# Altium PCB remote.PcbDoc (part 2 of 2)
Units mil, origin at the board's own origin, x right, y up, seen from the top; angles counter-clockwise.
Board outline 4260 x 2525 mil, 2 copper layers (Top Layer, Bottom Layer); 74 components, 68 nets, 281 pads, 69 vias.
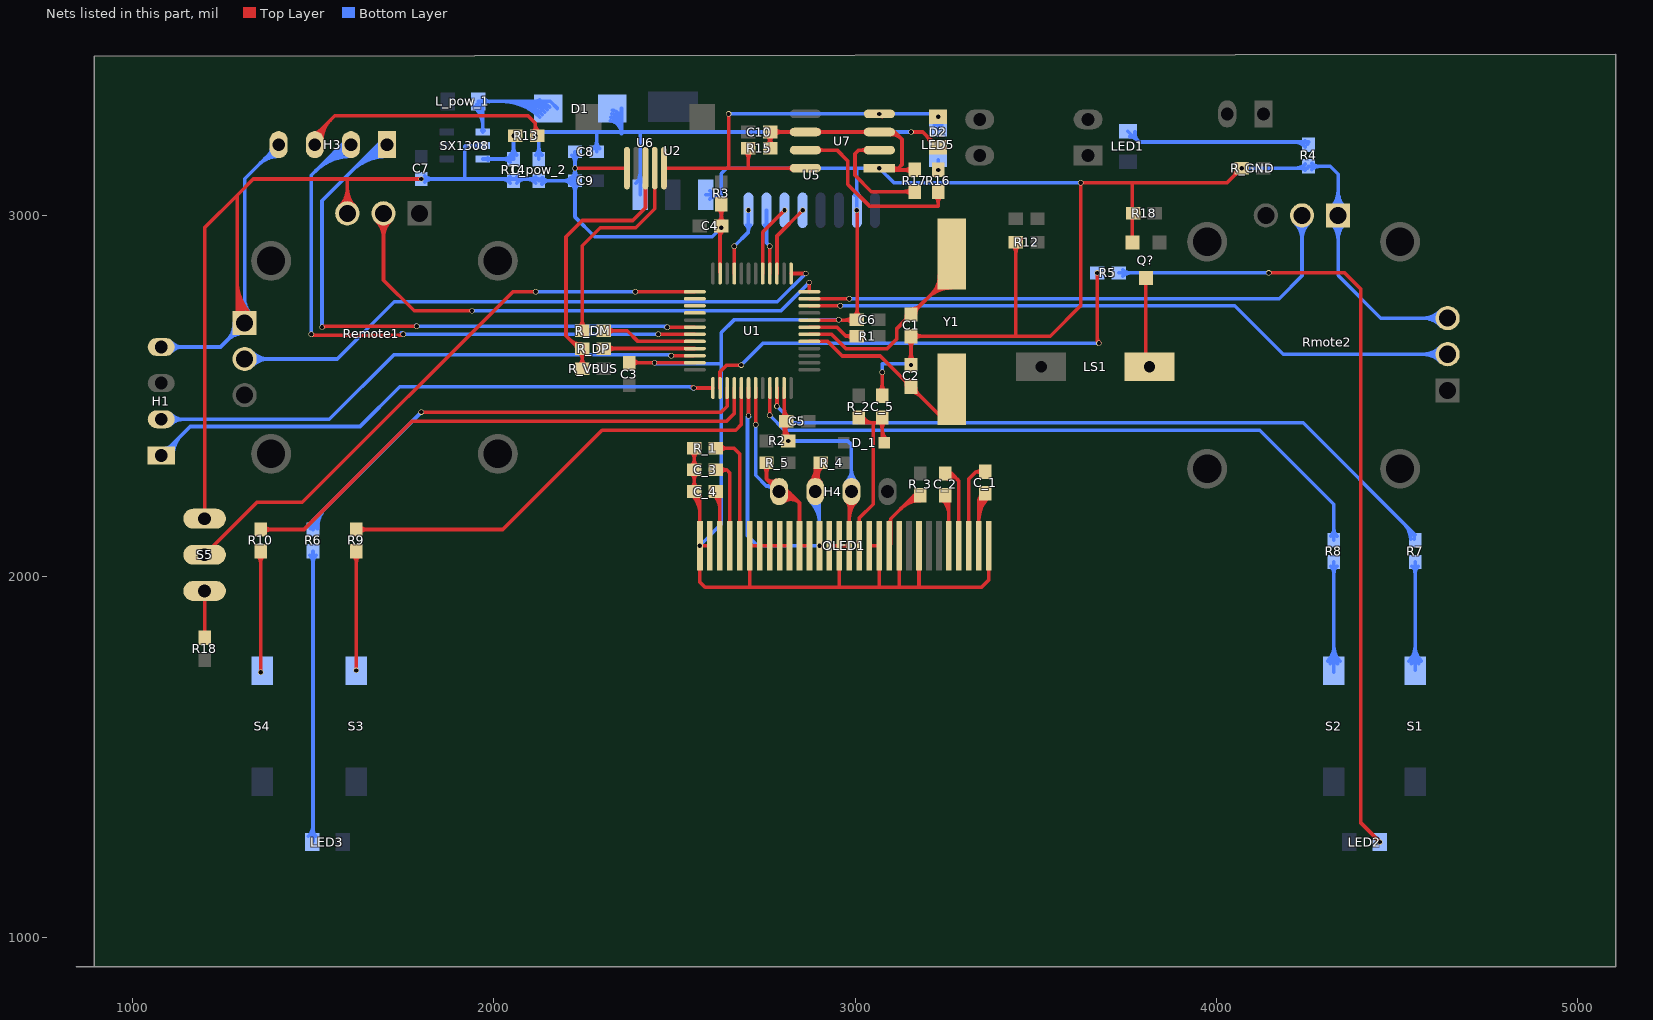
[diagram p2: the nets of this part, all layers, seen from the top]

## Via types
v1: diameter 15, hole 12, Top Layer to Bottom Layer, 69 vias

## Nets (pads, with @x,y where several pads share a name; then routed paths per layer and width w, separated by ;. In a path a pad name is that pad's centre, name@x,y a point inside that pad or via, vN(x,y) a via of type N, cw(c..) or ccw(c..) an arc to the next point about the centre after c; other vN are vias at no path point) (continued)
GND: C1.1 C2.1 C3.1 C4.1 C5.1 C6.1 C7.1 C8.1 C9.1 C10.1 C_3.1 C_4.1 C_5.1 C_pow_2.1 H1.4 H3.4 H4.2 OLED1.1 OLED1.8 OLED1.10 OLED1.12 OLED1.13 OLED1.15 OLED1.16 OLED1.17 OLED1.21 OLED1.22 OLED1.23 OLED1.24 OLED1.25 OLED1.29 OLED1.30 Q?.2 R2.1 R3.2 R4.2 R12.2 R14.2 R15.1 R17.1 R18.1@3770,3005 R_1.1 R_GND.1 Remote1.3 Remote1.4 Rmote2.3 Rmote2.4 S5.1 SX1308.2 U1.8 U1.23 U1.35 U1.47 U2.1 U5.2 U6.5 U7.1 U7.3 U7.6 | length 17459.2
  Top Layer w10: S5.1@1200,2160.01 1200,2965 1290,3055 ; Remote1.4@1290,2710 1290,3055 ; 1290,2748.23 ccw(c1357.13,2748.23) Remote1.4@1309.66,2700.76 ; 1290,2772.37 ccw(c1381.27,2772.37) Remote1.4@1316.73,2707.84 ; 1290,2796.52 ccw(c1405.41,2796.52) Remote1.4@1323.8,2714.91 ; 1290,2820.66 ccw(c1429.56,2820.66) Remote1.4@1330.88,2721.98 ; Remote1.3@1574.87,3025.13 ccw(c1526.28,3073.72) 1595,3073.72 ccw(c1663.72,3073.72) Remote1.3@1615.13,3025.13 ; Remote1.3@1581.94,3018.06 ccw(c1550.42,3049.58) 1595,3049.58 ccw(c1639.58,3049.58) Remote1.3@1608.06,3018.06 ; Remote1.3@1595,3005 1595,3100 ; v1(1800,3100) 1595,3100 ; v1@2225.12,3130.12 U6.5@2368.82,3130.12 ; C3.1@2376.42,2591.42 v1(2445,2591.42) U1.35@2556.54,2591.42 ; C3.1@2383.84,2583.66 cw(c2402.56,2564.94) 2402.56,2591.42 ; C3.1@2383.84,2601.34 ccw(c2407.79,2625.29) 2407.79,2591.42 ; C_4.1@2546.16,2243.84 ccw(c2524.82,2265.18) 2555,2265.18 ccw(c2585.18,2265.18) C_4.1@2563.84,2243.84 ; C_3.1@2546.16,2286.16 cw(c2524.82,2264.82) 2555,2264.82 cw(c2585.18,2264.82) C_3.1@2563.84,2286.16 ; C_3.1@2546.16,2303.84 ccw(c2524.82,2325.18) 2555,2325.18 ccw(c2585.18,2325.18) C_3.1@2563.84,2303.84 ; R_1.1@2546.16,2346.16 cw(c2524.82,2324.82) 2555,2324.82 cw(c2585.18,2324.82) R_1.1@2563.84,2346.16 ; C_4.1@2548.66,2226.16 cw(c2495.24,2172.74) 2570.79,2172.74 ; R_1.1@2555,2355 C_3.1@2555,2295 C_4.1@2555,2235 2570.79,2219.21 OLED1.30@2570.79,2085 ; C_4.1@2555.73,2233.23 cw(c2519.39,2196.89) 2570.79,2196.89 ; C_4.1@2562.8,2240.3 cw(c2543.53,2221.03) C_4.1@2570.79,2221.03 ; OLED1.30@2568.23,2083.23 cw(c2562.06,2077.06) OLED1.30@2570.79,2077.06 ; OLED1.30@2568.23,2086.77 ccw(c2562.06,2092.94) OLED1.30@2570.79,2092.94 ; OLED1.29@2598.35,2085 OLED1.30@2570.79,2085 ; C4.1@2618.66,2961.16 cw(c2599.94,2942.44) 2626.42,2942.44 ; C4.1@2621.16,2978.84 ccw(c2599.82,3000.18) 2630,3000.18 ccw(c2660.18,3000.18) C4.1@2638.84,2978.84 ; R3.2@2621.16,3018.66 cw(c2599.82,2997.32) 2630,2997.32 cw(c2660.18,2997.32) R3.2@2638.84,3018.66 ; U1.23@2626.42,2841.42 2626.42,2966.42 v1(2630,2965) R3.2@2630,3030 ; 2626.42,2937.21 cw(c2660.29,2937.21) C4.1@2636.34,2961.16 ; 2626.42,2950.32 cw(c2644.68,2950.32) C4.1@2631.77,2963.23 ; C4.1@2628.17,2963.3 cw(c2619.72,2955.45) 2629.71,2949.68 ; 2708.58,1971.42 OLED1.25@2708.58,2085 OLED1.24@2736.14,2085 OLED1.23@2763.7,2085 OLED1.22@2791.26,2085 OLED1.21@2818.82,2085 ; R15.1@2756.16,3193.84 ccw(c2734.82,3215.18) 2765,3215.18 ccw(c2795.18,3215.18) R15.1@2773.84,3193.84 ; C10.1@2756.16,3221.16 cw(c2734.82,3199.82) 2765,3199.82 cw(c2795.18,3199.82) C10.1@2773.84,3221.16 ; R15.1@2765,3185 C10.1@2765,3230 U7.6@2862.64,3230 U7.3@3067.36,3230 3110,3230 3130,3210 3130,3140 3120,3130 3085,3130 3090,3125 R17.1@3165,3125 ; C10.1@2776.34,3221.16 cw(c2797.68,3199.82) 2797.68,3230 cw(c2797.68,3260.18) C10.1@2776.34,3238.84 ; C5.1@2798.66,2421.16 cw(c2786.78,2409.28) 2803.58,2409.28 ; C5.1@2798.66,2438.84 ccw(c2786.78,2450.72) 2803.58,2450.72 ; R2.1@2803.58,2378.58 U1.47@2803.58,2521.54 ; R2.1@2803.58,2384.46 ccw(c2824.46,2384.46) R2.1@2809.7,2369.7 ; R2.1@2803.58,2390.36 cw(c2847.14,2390.36) C5.1@2816.34,2421.16 ; 2803.58,2402.56 ccw(c2840.06,2402.56) R2.1@2814.27,2376.77 ; 2803.58,2408.6 ccw(c2848.6,2408.6) R2.1@2816.77,2376.77 ; C5.1@2803.58,2426.71 ccw(c2864.21,2426.71) R2.1@2821.34,2383.84 ; 2803.58,2469.64 ccw(c2847.14,2469.64) C5.1@2816.34,2438.84 ; U7.6@2826.33,3225.18 ccw(c2814.7,3213.56) 2814.7,3230 ccw(c2814.7,3246.44) U7.6@2826.33,3234.82 ; U1.8@2873.46,2709.53 C6.1@3004.53,2709.53 ; U7.6@2898.95,3225.18 cw(c2910.58,3213.56) 2910.58,3230 cw(c2910.58,3246.44) U7.6@2898.95,3234.82 ; OLED1.17@2929.06,2085 OLED1.16@2956.61,2085 ; 2956.61,1973.39 OLED1.16@2956.61,2085 ; 2971.18,2709.53 ccw(c2971.18,2741.32) C6.1@2993.66,2718.84 ; 2973.46,2709.53 cw(c2973.46,2680.96) C6.1@2993.66,2701.16 ; H4.2@2975.86,2208.36 cw(c2955.78,2188.28) 2984.17,2188.28 ; 2984.17,2160.15 cw(c3052.35,2160.15) H4.2@3004.14,2208.36 ; 2984.17,2184.29 cw(c3028.21,2184.29) H4.2@2997.07,2215.43 ; C6.1@2996.16,2718.84 ccw(c2972.21,2742.79) 3006.08,2742.79 ; H4.2@3000,2250 2984.17,2234.17 OLED1.15@2984.17,2085 OLED1.16@2956.61,2085 ; v1@3003.23,3011.78 cw(c2996.35,3004.89) 3006.08,3004.89 ; C6.1@3005,2710 3006.08,2711.08 v1@3006.08,3008.92 ; 3006.08,2737.56 ccw(c3032.56,2737.56) C6.1@3013.84,2718.84 ; U7.3@3031.05,3225.18 ccw(c3019.42,3213.56) 3019.42,3230 ccw(c3019.42,3246.44) U7.3@3031.05,3234.82 ; OLED1.13@3039.29,2085 OLED1.12@3066.85,2085 3066.85,1971.85 ; C_5.1@3066.16,2511.34 ccw(c3044.82,2532.68) 3075,2532.68 ccw(c3105.18,2532.68) C_5.1@3083.84,2511.34 ; C_5.1@3075,2500 v1(3075,2565) ; U7.3@3098.86,3223.19 cw(c3098.86,3179.85) 3129.51,3210.49 ; U7.3@3098.86,3233.19 cw(c3098.86,3213.99) 3112.43,3227.57 ; U7.1@3103.67,3125.18 cw(c3115.3,3113.56) 3115.3,3130 cw(c3115.3,3146.44) 3103.67,3134.82 ccw(c3127.37,3158.51) 3127.37,3125 ; 3121.97,1971.97 OLED1.10@3121.97,2085 ; C2.1@3146.16,2596.34 ccw(c3124.82,2617.68) 3155,2617.68 ccw(c3185.18,2617.68) C2.1@3163.84,2596.34 ; C1.1@3146.16,2653.66 cw(c3124.82,2632.32) 3155,2632.32 cw(c3185.18,2632.32) C1.1@3163.84,2653.66 ; v1(3155,2585) C1.1@3155,2665 3540,2665 3625,2750 v1(3625,3090) 4030,3090 v1(4070,3130) ; R17.1@3156.16,3116.16 ccw(c3134.82,3094.82) 3134.82,3125 ccw(c3134.82,3155.18) R17.1@3156.16,3133.84 ; C1.1@3163.84,2656.16 cw(c3185.18,2634.82) 3185.18,2665 cw(c3185.18,2695.18) C1.1@3163.84,2673.84 ; 3177.09,1972.09 OLED1.8@3177.09,2085 ; OLED1.1@3370,2085 3370,1990 3350,1970 2585,1970 2570.79,1984.21 OLED1.30@2570.79,2085 ; R12.2@3436.16,2916.16 cw(c3414.82,2894.82) 3445,2894.82 cw(c3475.18,2894.82) R12.2@3453.84,2916.16 ; 3445,2665 R12.2@3445,2925 ; Q?.2@3767.6,2924.21 3767.6,3087.4 ; 4044.39,3104.39 ccw(c4018.79,3130) R_GND.1@4055,3130 ; 4050.43,3110.43 cw(c4067.5,3093.36) R_GND.1@4067.5,3117.5 ; 1290,3055 1335,3100 1595,3100
  Bottom Layer w10: H1.4@1080,2635 1243.9,2635 Remote1.4@1310.75,2701.85 1310.75,3100.75 H3.4@1405,3195 ; H1.4@1106.64,2620.86 cw(c1140.78,2586.72) 1140.78,2635 cw(c1140.78,2683.28) H1.4@1106.64,2649.14 ; Remote1.4@1282.28,2701.85 cw(c1213.56,2701.85) 1262.16,2653.26 cw(c1310.75,2604.67) Remote1.4@1310.75,2673.39 ; Remote1.4@1290.62,2721.98 ccw(c1242.03,2770.57) 1310.75,2770.57 ccw(c1379.47,2770.57) Remote1.4@1330.88,2721.98 ; Remote1.4@1292.28,2701.85 cw(c1247.71,2701.85) 1279.23,2670.33 cw(c1310.75,2638.81) Remote1.4@1310.75,2683.39 ; Remote1.4@1297.69,2714.91 ccw(c1266.17,2746.43) 1310.75,2746.43 ccw(c1355.32,2746.43) Remote1.4@1323.8,2714.91 ; 1349.52,3139.52 cw(c1405,3084.04) H3.4@1405,3162.5 ; 1366.59,3156.59 cw(c1405,3118.18) H3.4@1405,3172.5 ; 1379.7,3169.7 ccw(c1366.89,3182.5) H3.4@1385,3182.5 ; v1(1800,3100) 1920,3100 ; C7.1@1808.84,3091.16 cw(c1830.18,3069.82) 1830.18,3100 cw(c1830.18,3130.18) C7.1@1808.84,3108.84 ; SX1308.2@1956.78,3188.96 ccw(c1948.24,3180.43) 1948.24,3192.5 ccw(c1948.24,3204.57) SX1308.2@1956.78,3196.04 ; SX1308.2@1970,3192.5 1922.5,3192.5 1920,3190 1920,3100 ; 2018.79,3100 cw(c2018.79,3061.29) R14.2@2046.16,3088.66 ; 2030.86,3100 ccw(c2030.86,3121.64) R14.2@2046.16,3106.34 ; R14.2@2063.84,3088.66 cw(c2091.21,3061.29) 2091.21,3100 ; R14.2@2063.84,3106.34 ccw(c2079.14,3121.64) 2079.14,3100 ; 2088.79,3100 cw(c2088.79,3061.29) C_pow_2.1@2116.16,3088.66 ; 2100.86,3100 ccw(c2100.86,3121.64) C_pow_2.1@2116.16,3106.34 ; C_pow_2.1@2125,3095 C9.1@2225,3095 ; C_pow_2.1@2125,3100 1920,3100 ; C_pow_2.1@2133.84,3086.16 cw(c2155.18,3064.82) 2155.18,3095 cw(c2155.18,3125.18) C_pow_2.1@2133.84,3103.84 ; C9.1@2213.66,3086.16 ccw(c2192.32,3064.82) 2192.32,3095 ccw(c2192.32,3125.18) C9.1@2213.66,3103.84 ; C9.1@2216.16,3086.16 cw(c2194.82,3064.82) 2225,3064.82 cw(c2255.18,3064.82) C9.1@2233.84,3086.16 ; C9.1@2216.16,3103.84 ccw(c2194.82,3125.18) 2225,3125.18 ccw(c2255.18,3125.18) C9.1@2233.84,3103.84 ; C8.1@2216.16,3166.16 cw(c2194.82,3144.82) 2225,3144.82 cw(c2255.18,3144.82) C8.1@2233.84,3166.16 ; v1@2222.83,3128.75 cw(c2213.92,3123.6) 2223.86,3120.94 ; C8.1@2225,3175 C9.1@2225,3095 ; 2226.14,3120.94 cw(c2236.08,3123.6) v1@2227.17,3128.75 ; v1(2445,2591.42) 2447.81,2588.6 2630,2588.6 ; v1@2446.77,2593.19 ccw(c2457.83,2604.25) 2457.83,2588.6 ; v1(2570,2085) 2630,2145 2630,2588.6 ; U2.1@2586.55,3055.95 2629.05,3055.95 ; U2.1@2598.33,3044.18 cw(c2626.76,3015.75) 2626.76,3055.95 cw(c2626.76,3096.16) U2.1@2598.33,3067.73 ; v1(2815,2375) 2980,2375 2990,2365 H4.2@2990,2235 ; v1(2955,2710) 2665,2710 2630,2675 2630,2588.6 ; H4.2@2975.86,2261.64 ccw(c2941.72,2295.78) 2990,2295.78 ccw(c3038.28,2295.78) H4.2@3004.14,2261.64 ; U5.2@2998.79,3055.18 ccw(c2983.8,3070.17) 3005,3070.17 ccw(c3026.2,3070.17) U5.2@3011.21,3055.18 ; v1(3005,3013.54) 3005,3130 ; v1(3075,2565) 3075,2588.6 v1@3151.4,2588.6 ; 3140.27,2588.6 cw(c3140.27,2570.27) v1@3153.23,2583.23 ; v1(3625,3090) 3107.36,3090 v1(3067.36,3130) 3005,3130 ; v1(4070,3130) R4.2@4252.6,3130 ; 4218.79,3130 ccw(c4218.79,3168.71) R4.2@4246.16,3141.34 ; 4230.86,3130 cw(c4230.86,3108.36) R4.2@4246.16,3123.66 ; R4.2@4255,3135 4315,3135 4336.85,3113.15 Rmote2.4@4336.85,2999.25 4336.85,2833.15 4455,2715 Rmote2.3@4640,2715 ; R4.2@4263.84,3126.16 cw(c4285.18,3104.82) 4285.18,3135 cw(c4285.18,3165.18) R4.2@4263.84,3143.84 ; Rmote2.4@4316.72,2979.12 cw(c4268.13,2930.53) 4336.85,2930.53 cw(c4405.57,2930.53) Rmote2.4@4356.98,2979.12 ; Rmote2.4@4316.72,3019.38 ccw(c4268.13,3067.97) 4336.85,3067.97 ccw(c4405.57,3067.97) Rmote2.4@4356.98,3019.38 ; Rmote2.4@4323.79,2986.2 cw(c4292.27,2954.68) 4336.85,2954.68 cw(c4381.43,2954.68) Rmote2.4@4349.91,2986.2 ; Rmote2.4@4323.79,3012.31 ccw(c4292.27,3043.83) 4336.85,3043.83 ccw(c4381.43,3043.83) Rmote2.4@4349.91,3012.31 ; Rmote2.3@4619.87,2694.87 ccw(c4571.28,2646.28) 4571.28,2715 ccw(c4571.28,2783.72) Rmote2.3@4619.87,2735.13 ; Rmote2.3@4626.94,2701.94 ccw(c4595.42,2670.42) 4595.42,2715 ccw(c4595.42,2759.58) Rmote2.3@4626.94,2728.06 ; C9.1@2225,3095 2225,2995 2280,2940 2605,2940 v1(2630,2965) 2630,3115 2645,3130 3005,3130
  other v1: 2225,3130
IRQ: U1.21 U5.8 | length 224.6
  Top Layer w10: U1.21@2665.79,2838.46 v1(2665.79,2914.21)
  Bottom Layer w10: v1(2665.79,2914.21) 2705,2953.43 v1(2705,3013.54) ; U5.8@2698.79,2971.9 cw(c2683.8,2956.91) 2705,2956.91 cw(c2726.2,2956.91) U5.8@2711.21,2971.9
KEY1: R7.2 U1.46 | length 2039.9
  Top Layer w10: v1(2783.9,2471.1) U1.46@2783.9,2521.54
  Bottom Layer w10: v1(2783.9,2471.1) 2830,2425 4240,2425 R7.2@4550,2115 ; 4519.82,2145.18 cw(c4477.14,2102.5) R7.2@4537.5,2102.5 ; 4536.89,2128.11 cw(c4511.29,2102.5) R7.2@4547.5,2102.5
KEY2: R8.2 U1.45 | length 1885.7
  Top Layer w10: v1(2764.21,2445.79) U1.45@2764.21,2521.54
  Bottom Layer w10: v1(2764.21,2445.79) 2805,2405 4120,2405 4325,2200 R8.2@4325,2100 ; R8.2@4316.16,2111.34 ccw(c4294.82,2132.68) 4325,2132.68 ccw(c4355.18,2132.68) R8.2@4333.84,2111.34
KEY3: R9.2 U1.41 | length 1334.3
  Top Layer w10: R9.2@1620,2130 2025,2130 2300,2405 2670,2405 2685.47,2420.47 U1.41@2685.47,2521.54 ; R9.2@1628.84,2121.16 cw(c1650.18,2099.82) 1650.18,2130 cw(c1650.18,2160.18) R9.2@1628.84,2138.84
KEY4: R10.2 U1.40 | length 1561.8
  Top Layer w10: R10.2@1355,2130 1475,2130 1775,2430 2645,2430 2665.79,2450.79 U1.40@2665.79,2521.54 ; R10.2@1363.84,2121.16 cw(c1385.18,2099.82) 1385.18,2130 cw(c1385.18,2160.18) R10.2@1363.84,2138.84
LED1: R5.2 U1.38 | length 1341.2
  Top Layer w10: U1.38@2626.42,2521.54 2626.42,2566.42 2645,2585 v1(2685,2585) ; 3670,2663.11 ccw(c3693.11,2663.11) v1@3676.77,2646.77 ; v1(3670,2840) 3670,2650 v1(3675,2645)
  Bottom Layer w10: v1(2685,2585) 2745,2645 v1(3675,2645)
LED2: R6.2 U1.39 | length 1523.1
  Top Layer w10: v1(1800,2455) 2630,2455 2646.1,2471.1 U1.39@2646.1,2521.54
  Bottom Layer w10: R6.2@1492.5,2132.5 cw(c1528.71,2132.5) 1503.11,2158.11 ; R6.2@1493.4,2143.11 ccw(c1486,2155) 1500,2155 ; R6.2@1500,2130 1500,2155 ; R6.2@1502.5,2132.5 cw(c1562.86,2132.5) 1520.18,2175.18 ; R6.2@1506.6,2143.11 cw(c1514,2155) 1500,2155 ; R6.2@1512.5,2132.5 cw(c1597,2132.5) 1537.25,2192.25 ; v1(1800,2455) 1500,2155
MISO: U1.16 U5.7 | length 213.3
  Top Layer w10: U1.16@2764.21,2838.46 v1(2764.21,2914.21) v1@2765,2915
  Bottom Layer w10: U5.7@2748.79,2971.9 cw(c2733.8,2956.91) 2755,2956.91 cw(c2776.2,2956.91) U5.7@2761.21,2971.9 ; U5.7@2755,3013.54 2755,2923.43 v1(2764.21,2914.21)
MOSI: U1.17 U5.6 | length 200.1
  Top Layer w10: U1.17@2744.53,2838.46 2744.53,2953.07 v1(2805,3013.54)
NetC_1_1: C_1.1 OLED1.3 | length 273.1
  Top Layer w10: OLED1.3@3314.88,2085 3314.88,2269.88 3335,2290 ; C_1.1@3350,2282.5 ccw(c3335,2271.25) 3335,2290 ; C_1.1@3350,2297.5 cw(c3335,2308.75) 3335,2290 ; C_1.1@3360,2290 3335,2290
NetC_1_2: C_1.2 OLED1.2 | length 337.8
  Top Layer w10: OLED1.2@3342.44,2085 3342.44,2212.44 ; 3342.44,2154.93 cw(c3432.57,2154.93) C_1.2@3368.84,2218.66 ; 3342.44,2179.07 cw(c3408.43,2179.07) C_1.2@3361.77,2225.73 ; 3342.44,2203.22 cw(c3384.28,2203.22) C_1.2@3354.7,2232.8 ; C_1.2@3347.55,2226.43 cw(c3329.96,2224.92) 3342.44,2212.44 ; C_1.2@3356.04,2215.64 ccw(c3351.83,2203.05) 3342.44,2212.44 ; C_1.2@3360,2230 3342.44,2212.44
NetC_2_1: C_2.1 OLED1.5 | length 224.8
  Top Layer w10: C_2.1@3241.16,2213.66 cw(c3196.25,2168.75) 3259.76,2168.75 ; C_2.1@3248.23,2220.73 cw(c3220.39,2192.89) 3259.76,2192.89 ; C_2.1@3250,2225 3259.76,2215.24 OLED1.5@3259.76,2085
NetC_2_2: C_2.2 OLED1.4 | length 271.3
  Top Layer w10: C_2.2@3251.01,2280.21 cw(c3260.43,2258.79) 3276.98,2275.34 ; C_2.2@3255.03,2271.06 cw(c3266.75,2244.43) 3287.32,2265 ; C_2.2@3267.32,2285 3287.32,2265 ; OLED1.4@3287.32,2085 3287.32,2265
NetC_3_2: C_3.2 OLED1.27 | length 284.5
  Top Layer w10: C_3.2@2615,2295 2645,2295 ; C_3.2@2626.92,2286.78 cw(c2645,2271) 2645,2295 ; C_3.2@2626.92,2303.22 ccw(c2645,2319) 2645,2295 ; OLED1.27@2653.46,2085 2653.46,2286.54 2645,2295
NetC_4_2: C_4.2 OLED1.28 | length 228
  Top Layer w10: C_4.2@2608.66,2226.16 cw(c2567.03,2184.53) 2625.91,2184.53 ; C_4.2@2615,2235 2625.91,2224.09 OLED1.28@2625.91,2085 ; C_4.2@2615.73,2233.23 cw(c2591.17,2208.67) 2625.91,2208.67
NetC_5_2: C_5.2 D_1.1 OLED1.14 R_2.1 | length 649
  Top Layer w10: R_2.1@3010,2425 3050,2425 ; OLED1.14@3011.73,2085 3011.73,2161.73 3050,2200 3050,2425 ; R_2.1@3012.25,2438.6 ccw(c3034,2449.2) 3034,2425 ; R_2.1@3021.24,2442.98 ccw(c3050,2457) 3050,2425 ; C_5.2@3066.16,2428.66 cw(c3044.82,2407.32) 3075,2407.32 cw(c3105.18,2407.32) C_5.2@3083.84,2428.66 ; D_1.1@3075,2361 3075,2425 3050,2425 ; 3075,2386.29 ccw(c3097.29,2386.29) D_1.1@3081.53,2370.53 ; 3075,2410.43 ccw(c3121.43,2410.43) D_1.1@3088.6,2377.6
NetD1_1: D1.1 L_pow_1.1 SX1308.1 | length 929
  Bottom Layer w10: L_pow_1.1@1946.89,3299.39 cw(c1891.11,3243.61) 1970,3243.61 ; L_pow_1.1@1953.96,3306.46 cw(c1915.25,3267.75) 1970,3267.75 ; L_pow_1.1@1957.5,3315 2156.42,3315 D1.1@2176.42,3295 ; L_pow_1.1@1961.04,3313.54 cw(c1939.39,3291.89) L_pow_1.1@1970,3291.89 ; SX1308.1@1966.46,3233.54 ccw(c1957.93,3242.07) 1970,3242.07 ccw(c1982.07,3242.07) SX1308.1@1973.54,3233.54 ; L_pow_1.1@1967.5,3310 1970,3307.5 SX1308.1@1970,3230 ; L_pow_1.1@1968.11,3304.39 cw(c1993.71,3278.79) 1993.71,3315 cw(c1993.71,3351.21) L_pow_1.1@1968.11,3325.61 ; 2020.16,3315 cw(c2020.16,3163.74) D1.1@2127.11,3270.7 ; 2044.3,3315 cw(c2044.3,3187.88) D1.1@2134.19,3277.77 ; 2068.44,3315 cw(c2068.44,3212.02) D1.1@2141.26,3284.84 ; 2092.58,3315 cw(c2092.58,3236.17) D1.1@2148.33,3291.91 ; D1.1@2127.11,3319.3 cw(c2116.72,3329.69) 2116.72,3315 cw(c2116.72,3260.31) D1.1@2155.4,3298.98
NetD2_1: D2.1 LED5.1 R15.2 U6.1 U7.4 U7.8 | length 1372.1
  Top Layer w10: U6.1@2471.3,3130 2650,3130 ; v1(2650,3280) 2650,3130 ; R15.2@2696.16,3176.16 cw(c2674.82,3154.82) 2705,3154.82 cw(c2735.18,3154.82) R15.2@2713.84,3176.16 ; 2705,3135 R15.2@2705,3185 ; U7.8@2826.33,3125.18 ccw(c2814.7,3113.56) 2814.7,3130 ccw(c2814.7,3146.44) U7.8@2826.33,3134.82 ; U7.8@2862.64,3130 2650,3130 ; v1(3067.36,3280) U7.4@3074.86,3272.5
  Bottom Layer w10: v1(2650,3280) v1(3067.36,3280) 3222.5,3280 v1(3230,3272.5) ; 3205.86,3280 cw(c3205.86,3248.36) v1@3228.23,3270.73 ; LED5.1@3219.66,3248.36 ccw(c3196.67,3272.5) v1(3230,3272.5) ; LED5.1@3230,3237.5 v1(3230,3272.5) ; LED5.1@3240.34,3248.36 cw(c3263.33,3272.5) v1(3230,3272.5)
NetLED1_2: LED1.2 R4.1 | length 628.1
  Bottom Layer w10: LED1.2@3755,3232.5 3785.1,3202.4 ; LED1.2@3760,3217.5 cw(c3760,3193.36) 3777.07,3210.43 ; LED1.2@3774.92,3230.98 ccw(c3810.1,3227.4) 3785.1,3202.4 ; 4212.99,3202.4 cw(c4212.99,3155.49) R4.1@4246.16,3188.66 ; 4236.66,3202.4 ccw(c4236.66,3215.84) R4.1@4246.16,3206.34 ; 4237.13,3202.4 cw(c4237.13,3179.63) R4.1@4253.23,3195.73 ; R4.1@4255,3202.4 3785.1,3202.4
NetLED2_2: LED2.2 R5.1 | length 2287.8
  Top Layer w10: v1(4145,2840) 4355,2840 4400,2795 4400,1317.5 v1(4452.5,1265)
  Bottom Layer w10: R5.1@3730,2840 v1(4145,2840) ; R5.1@3741.34,2831.16 cw(c3762.68,2809.82) 3762.68,2840 cw(c3762.68,2870.18) R5.1@3741.34,2848.84
NetLED3_2: LED3.2 R6.1 | length 906.8
  Bottom Layer w10: LED3.2@1486.89,1280.61 ccw(c1455.25,1312.25) 1500,1312.25 ; R6.1@1491.16,2058.66 cw(c1469.82,2037.32) 1500,2037.32 cw(c1530.18,2037.32) R6.1@1508.84,2058.66 ; LED3.2@1500,1267.5 R6.1@1500,2070 ; 1500,1300.18 ccw(c1527.68,1300.18) LED3.2@1508.11,1280.61
NetLED5_2: LED5.2 R16.1 | length 65.4
  Top Layer w10: R16.1@3227.5,3125 v1(3230,3125)
  Bottom Layer w10: LED5.2@3221.88,3139.89 cw(c3212.29,3125) v1(3230,3125) ; LED5.2@3230,3152.5 v1(3230,3125) ; LED5.2@3238.12,3139.89 ccw(c3247.71,3125) v1(3230,3125)
NetLS1_2: LS1.2 Q?.3 | length 235.8
  Top Layer w10: LS1.2@3805,2590 Q?.3@3805,2825.79
NetOLED1_11: OLED1.11 R_3.1 | length 318.2
  Top Layer w10: OLED1.11@3092.82,2148.42 ccw(c3085.06,2160.11) 3099.09,2160.11 ; OLED1.11@3094.41,2085 3099.09,2089.69 3099.09,2160.11 ; 3127.05,2188.07 cw(c3180,2135.12) R_3.1@3180,2210 ; 3144.12,2205.14 cw(c3180,2169.26) R_3.1@3180,2220 ; 3161.19,2222.21 cw(c3180,2203.4) R_3.1@3180,2230 ; R_3.1@3180,2225 3163.98,2225 3099.09,2160.11
NetOLED1_26: OLED1.26 R_1.2 | length 369
  Top Layer w10: R_1.2@2620,2355 2665,2355 2681.02,2338.98 OLED1.26@2681.02,2085 ; R_1.2@2626.34,2346.16 cw(c2647.68,2324.82) 2647.68,2355 cw(c2647.68,2385.18) R_1.2@2626.34,2363.84
NetR7_1: R7.1 S1.2 | length 495.5
  Bottom Layer w10: S1.2@4532.66,1765.73 ccw(c4490.79,1807.6) 4550,1807.6 ccw(c4609.21,1807.6) S1.2@4567.34,1765.73 ; S1.2@4539.73,1758.66 ccw(c4514.93,1783.46) 4550,1783.46 ccw(c4585.07,1783.46) S1.2@4560.27,1758.66 ; R7.1@4541.16,2028.66 cw(c4519.82,2007.32) 4550,2007.32 cw(c4580.18,2007.32) R7.1@4558.84,2028.66 ; S1.2@4550,1740 R7.1@4550,2040
NetR8_1: R8.1 S2.2 | length 500.5
  Bottom Layer w10: S2.2@4307.66,1765.73 ccw(c4265.79,1807.6) 4325,1807.6 ccw(c4384.21,1807.6) S2.2@4342.34,1765.73 ; S2.2@4314.73,1758.66 ccw(c4289.93,1783.46) 4325,1783.46 ccw(c4360.07,1783.46) S2.2@4335.27,1758.66 ; R8.1@4316.16,2028.66 cw(c4294.82,2007.32) 4325,2007.32 cw(c4355.18,2007.32) R8.1@4333.84,2028.66 ; S2.2@4325,1735 R8.1@4325,2040
NetR9_1: R9.1 S3.2 | length 377.4
  Top Layer w10: R9.1@1611.16,2058.66 cw(c1589.82,2037.32) 1620,2037.32 cw(c1650.18,2037.32) R9.1@1628.84,2058.66 ; v1(1620,1740) R9.1@1620,2070
NetR10_1: R10.1 S4.2 | length 382.4
  Top Layer w10: R10.1@1346.16,2058.66 cw(c1324.82,2037.32) 1355,2037.32 cw(c1385.18,2037.32) R10.1@1363.84,2058.66 ; v1(1355,1735) R10.1@1355,2070
NetR13_2: R13.2 R14.1 SX1308.3 | length 263.8
  Bottom Layer w10: SX1308.3@1970,3155.2 2054.8,3155.2 R14.1@2055,3155 v1(2055,3220) ; SX1308.3@1983.22,3151.66 cw(c1991.76,3143.13) 1991.76,3155.2 cw(c1991.76,3167.27) SX1308.3@1983.22,3158.73 ; 2024.35,3155.2 cw(c2024.35,3124.35) R14.1@2046.16,3146.16 ; 2025.3,3155.2 ccw(c2025.3,3184.7) R14.1@2046.16,3163.84 ; R14.1@2046.16,3166.34 ccw(c2024.82,3187.68) 2055,3187.68 ccw(c2085.18,3187.68) R14.1@2063.84,3166.34
NetR16_2: R16.2 U7.7 | length 582.9
  Top Layer w10: U7.7@2862.64,3180 2950,3180 2980,3150 2980,3085 3040,3025 3230,3025 R16.2@3230,3065 ; U7.7@2898.95,3175.18 cw(c2910.58,3163.56) 2910.58,3180 cw(c2910.58,3196.44) U7.7@2898.95,3184.82 ; R16.2@3221.16,3053.66 cw(c3199.82,3032.32) 3230,3032.32 cw(c3260.18,3032.32) R16.2@3238.84,3053.66
NetR17_2: R17.2 U7.2 | length 422.3
  Top Layer w10: U7.2@3031.05,3175.18 ccw(c3019.42,3163.56) 3019.42,3180 ccw(c3019.42,3196.44) U7.2@3031.05,3184.82 ; U7.2@3106.29,3180 U7.2@3067.36,3180 3010,3180 3000,3170 3000,3110 3045,3065 R17.2@3160,3065 ; R17.2@3156.16,3056.16 ccw(c3134.82,3034.82) 3134.82,3065 ccw(c3134.82,3095.18) R17.2@3156.16,3073.84
NetR18_2: R18.2@1200,1830 S5.3 | length 130
  Top Layer w10: R18.2@1200,1830 S5.3@1200,1960.01
NetR_DM_2: R_DM.2 U6.2 | length 638.2
  Top Layer w10: R_DM.2@2236.16,2688.84 ccw(c2214.82,2710.18) 2245,2710.18 ccw(c2275.18,2710.18) R_DM.2@2253.84,2688.84 ; R_DM.2@2245,2680 2245,2915 2295,2965 2393.28,2965 2445.59,3017.31 U6.2@2445.59,3130.12
NetR_DP_2: R_DP.2 R_VBUS.2 U6.3 | length 894.2
  Top Layer w10: 2210.55,2655.73 ccw(c2242.5,2687.68) R_DP.2@2242.5,2642.5 ; R_DP.2@2225.55,2640.73 cw(c2214.82,2630) R_DP.2@2230,2630 ; R_VBUS.2@2236.16,2583.84 ccw(c2214.82,2605.18) 2245,2605.18 ccw(c2275.18,2605.18) R_VBUS.2@2253.84,2583.84 ; R_DP.2@2236.16,2621.16 cw(c2214.82,2599.82) 2245,2599.82 cw(c2275.18,2599.82) R_DP.2@2253.84,2621.16 ; R_VBUS.2@2245,2575 R_DP.2@2245,2630 2236.29,2630 2200,2666.29 2200,2940 2245,2985 2385,2985 2420,3020 U6.3@2420,3130.12
NRST: R1.2 U1.7 | length 182.8
  Top Layer w10: U1.7@2873.46,2689.84 2950.16,2689.84 2975,2665 ; R1.2@2993.08,2656.78 ccw(c2975,2641) 2975,2665 ; R1.2@2993.08,2673.22 cw(c2975,2689) 2975,2665 ; R1.2@3005,2665 2975,2665
PA0: Rmote2.2 U1.10 | length 2000
  Top Layer w10: U1.10@2873.46,2748.9 v1(2958.9,2748.9)
  Bottom Layer w10: v1(2958.9,2748.9) 4051.1,2748.9 4185,2615 Rmote2.2@4640,2615 ; Rmote2.2@4619.87,2594.87 ccw(c4571.28,2546.28) 4571.28,2615 ccw(c4571.28,2683.72) Rmote2.2@4619.87,2635.13 ; Rmote2.2@4626.94,2601.94 ccw(c4595.42,2570.42) 4595.42,2615 ccw(c4595.42,2659.58) Rmote2.2@4626.94,2628.06
PA1: Rmote2.5 U1.11 | length 1735
  Top Layer w10: U1.11@2873.46,2768.58 v1(2983.58,2768.58)
  Bottom Layer w10: v1(2983.58,2768.58) 4173.58,2768.58 4236.85,2831.85 Rmote2.5@4236.85,2999.25 ; Rmote2.5@4216.72,2979.12 cw(c4168.13,2930.53) 4236.85,2930.53 cw(c4305.57,2930.53) Rmote2.5@4256.98,2979.12 ; Rmote2.5@4223.79,2986.2 cw(c4192.27,2954.68) 4236.85,2954.68 cw(c4281.43,2954.68) Rmote2.5@4249.91,2986.2
PA2: Remote1.2 U1.12 | length 1634.3
  Top Layer w10: Remote1.2@1674.87,2984.87 cw(c1626.28,2936.28) 1695,2936.28 cw(c1763.72,2936.28) Remote1.2@1715.13,2984.87 ; Remote1.2@1681.94,2991.94 cw(c1650.42,2960.42) 1695,2960.42 cw(c1739.58,2960.42) Remote1.2@1708.06,2991.94 ; Remote1.2@1695,3005 1695,2820 1780,2735 v1(1940,2735) ; U1.12@2873.46,2788.27 v1(2873.46,2813.46)
  Bottom Layer w10: v1(1940,2735) 2795,2735 v1(2873.46,2813.46)
PA3: Remote1.5 U1.13 | length 1868.9
  Top Layer w10: U1.13@2823.27,2838.46 v1(2863.46,2838.46)
  Bottom Layer w10: Remote1.5@1310.75,2601.85 1566.85,2601.85 1725,2760 2785,2760 v1(2863.46,2838.46) ; Remote1.5@1323.8,2588.79 cw(c1355.32,2557.27) 1355.32,2601.85 cw(c1355.32,2646.43) Remote1.5@1323.8,2614.91 ; Remote1.5@1330.88,2581.72 cw(c1379.47,2533.13) 1379.47,2601.85 cw(c1379.47,2670.57) Remote1.5@1330.88,2621.98
PB12: S5.2 U1.25 | length 1658.2
  Top Layer w10: S5.2@1200,2060.01 1345,2205 1470,2205 2053.27,2788.27 v1(2116.73,2788.27) ; v1(2391.73,2788.27) U1.25@2556.54,2788.27
  Bottom Layer w10: v1(2116.73,2788.27) v1(2391.73,2788.27)
PB13: U1.26
PB14: U1.27
PB15: U1.28
SCK: U1.15 U5.5 | length 204.5
  Top Layer w10: U1.15@2783.9,2838.46 2783.9,2942.44 v1(2855,3013.54)
SCL: H4.3 OLED1.18 R_4.2 U1.42 | length 1257.1
  Top Layer w10: v1(2705.16,2445.16) U1.42@2705.16,2521.54 ; H4.3@2875.86,2261.64 ccw(c2841.72,2295.78) 2890,2295.78 ccw(c2938.28,2295.78) H4.3@2904.14,2261.64 ; H4.3@2880.72,2265.21 ccw(c2863.86,2297.37) 2898.93,2287.98 ccw(c2928.07,2280.17) H4.3@2905.18,2260.53 ; H4.3@2890,2235 2890,2300 R_4.2@2905,2315 ; H4.3@2890,2254.64 cw(c2962.86,2254.64) R_4.2@2911.34,2306.16 ; 2890,2278.79 cw(c2938.71,2278.79) R_4.2@2904.27,2313.23
  Bottom Layer w10: 2702.5,2432.71 cw(c2717.61,2432.71) v1@2706.93,2443.39 ; v1@2707.81,2442.5 v1(2705.16,2445.16) 2702.5,2442.5 2702.5,2112.5 2730,2085 v1(2901.5,2085) 2901.5,2223.5 H4.3@2890,2235 ; H4.3@2875.86,2208.36 cw(c2813.96,2146.46) 2901.5,2146.46 ; H4.3@2882.93,2215.43 cw(c2838.1,2170.6) 2901.5,2170.6 ; H4.3@2890,2222.5 cw(c2862.25,2194.75) 2901.5,2194.75
SDA: H4.4 OLED1.19 OLED1.20 R_5.2 U1.43 | length 1048.1
  Top Layer w10: U1.43@2724.84,2521.54 2724.84,2420.16 v1(2725,2420) ; R_5.2@2746.16,2306.16 cw(c2724.82,2284.82) 2755,2284.82 cw(c2785.18,2284.82) R_5.2@2763.84,2306.16 ; R_5.2@2755,2315 2755,2270 ; 2764.7,2260.3 cw(c2751.89,2247.5) H4.4@2770,2247.5 ; 2764.97,2260.03 ccw(c2777.8,2272.86) H4.4@2785.66,2256.51 ; H4.4@2771.81,2246.36 cw(c2787.56,2225.7) H4.4@2805.93,2244.07 ; H4.4@2777.88,2238.41 cw(c2794.56,2216.52) H4.4@2814.02,2235.98 ; H4.4@2781.33,2265.52 cw(c2771.32,2286.32) 2755,2270 ; H4.4@2783.94,2230.45 cw(c2801.56,2207.34) 2822.11,2227.89 ; H4.4@2790,2222.5 cw(c2808.56,2198.16) 2830.2,2219.8 ; H4.4@2790,2235 2755,2270 ; H4.4@2796.06,2214.55 cw(c2815.55,2188.98) 2838.29,2211.71 ; H4.4@2800,2250 2846.38,2203.62 ; H4.4@2802.12,2206.59 cw(c2822.55,2179.8) 2846.38,2203.62 ; OLED1.19@2873.94,2085 OLED1.20@2846.38,2085 2846.38,2203.62
  Bottom Layer w10: v1(2725,2420) 2725,2280 2755,2250 ; H4.4@2771.8,2239.2 ccw(c2755,2231.53) 2755,2250 ; H4.4@2774,2259.5 cw(c2755,2273.75) 2755,2250 ; H4.4@2800,2250 2755,2250
SWCLK: H1.1 U1.37 | length 1746.5
  Top Layer w10: v1@2550,2525 v1(2553.46,2521.54) U1.37@2606.73,2521.54
  Bottom Layer w10: H1.1@1080,2335 1160,2415 1630,2415 1740,2525 2550,2525 v1@2555,2520 ; H1.1@1092.5,2355 ccw(c1092.5,2373.11) 1105.3,2360.3 ; H1.1@1102.5,2335 cw(c1156.82,2335) 1118.41,2373.41 ; H1.1@1112.5,2335 cw(c1190.96,2335) 1135.48,2390.48 ; 2539.06,2525 cw(c2539.06,2507.14) v1@2551.7,2519.77
SWDIO: H1.2 U1.34 | length 1637
  Top Layer w10: v1(2491.1,2611.1) U1.34@2553.58,2611.1
  Bottom Layer w10: H1.2@1080,2435 1545,2435 1723.92,2613.92 2488.29,2613.92 v1(2491.1,2611.1) ; H1.2@1106.64,2420.86 cw(c1140.78,2386.72) 1140.78,2435 cw(c1140.78,2483.28) H1.2@1106.64,2449.14 ; 2478.27,2613.92 cw(c2478.27,2598.27) v1@2489.33,2609.33
UART1_RX: H3.2 U1.31 | length 2041.2
  Top Layer w10: v1(1495,2670) 1497.5,2667.5 v1@1747.19,2667.5 ; v1@1496.77,2671.77 ccw(c1507.07,2682.07) 1507.07,2667.5 ; 1737.39,2667.5 ccw(c1737.39,2682.61) v1@1748.07,2671.93 ; v1(2455.16,2670.16) U1.31@2556.54,2670.16
  Bottom Layer w10: v1(1495,2670) 1495,3110 H3.2@1595,3210 ; 1506.84,3121.84 cw(c1605,3023.68) H3.2@1605,3162.5 ; 1523.91,3138.91 cw(c1605,3057.82) H3.2@1605,3172.5 ; 1540.98,3155.98 cw(c1605,3091.97) H3.2@1605,3182.5 ; 1558.05,3173.05 cw(c1605,3126.11) H3.2@1605,3192.5 ; 1575.13,3190.13 cw(c1605,3160.25) H3.2@1605,3202.5 ; H3.2@1592.2,3207.2 cw(c1605,3194.39) H3.2@1605,3212.5 ; v1@1745,2675 v1(1749.84,2670.16) v1(2455.16,2670.16)
UART1_TX: H3.1 U1.30 | length 2017.7
  Top Layer w10: v1@1526.77,2688.23 cw(c1537.45,2677.55) 1537.45,2692.66 ; v1@1527.66,2692.66 v1(1787.34,2692.66) ; v1(2480.16,2689.84) U1.30@2556.54,2689.84
  Bottom Layer w10: v1(1525,2690) 1525,3040 H3.1@1695,3210 ; 1606.84,3121.84 cw(c1705,3023.68) H3.1@1705,3162.5 ; 1623.91,3138.91 cw(c1705,3057.82) H3.1@1705,3172.5 ; 1640.98,3155.98 cw(c1705,3091.97) H3.1@1705,3182.5 ; 1658.05,3173.05 cw(c1705,3126.11) H3.1@1705,3192.5 ; 1675.13,3190.13 cw(c1705,3160.25) H3.1@1705,3202.5 ; H3.1@1692.2,3207.2 cw(c1705,3194.39) H3.1@1705,3212.5 ; v1@1785,2695 v1(1787.34,2692.66) 2477.34,2692.66 v1(2480.16,2689.84) ; 2467.33,2692.66 cw(c2467.33,2677.01) v1@2478.39,2688.07
USB_DM: R_DM.1 U1.32 | length 311.2
  Top Layer w10: R_DM.1@2305,2680 2370,2680 2399.53,2650.47 U1.32@2556.54,2650.47 ; R_DM.1@2316.34,2671.16 cw(c2337.68,2649.82) 2337.68,2680 cw(c2337.68,2710.18) R_DM.1@2316.34,2688.84
USB_DP: R_DP.1 U1.33 | length 298.2
  Top Layer w10: R_DP.1@2305.79,2630.79 U1.33@2556.54,2630.79 ; R_DP.1@2316.34,2621.16 cw(c2339.58,2597.92) 2339.58,2630.79 ; R_DP.1@2316.34,2638.84 ccw(c2335.78,2658.28) 2335.78,2630.79
VCC: C8.2 C_pow_2.2 D1.2 D2.2 H3.3 R13.1 U2.3 | length 2771.3
  Top Layer w10: H3.3@1495,3210 1560,3275 2095,3275 2115,3255 ; H3.3@1505,3227.5 ccw(c1505,3245.61) 1517.8,3232.8 ; H3.3@1515,3207.5 cw(c1569.32,3207.5) 1530.91,3245.91 ; H3.3@1525,3207.5 cw(c1603.46,3207.5) 1547.98,3262.98 ; R13.1@2108.66,3228.84 ccw(c2093.36,3244.14) 2115,3244.14 ; v1(2115,3220) 2115,3255 ; R13.1@2126.12,3229.05 cw(c2150.83,3255) 2115,3255 ; v1(3155,3230) 3187.5,3230 D2.2@3230,3187.5 ; 3195.86,3221.64 cw(c3161.72,3187.5) D2.2@3210,3187.5 ; 3207.93,3209.57 ccw(c3225,3226.64) D2.2@3225,3202.5 ; D2.2@3212.93,3204.57 cw(c3195.86,3187.5) D2.2@3220,3187.5
  Bottom Layer w10: C_pow_2.2@2116.16,3166.34 ccw(c2094.82,3187.68) 2125,3187.68 ccw(c2155.18,3187.68) C_pow_2.2@2133.84,3166.34 ; C_pow_2.2@2125,3155 2125,3210 v1(2115,3220) 2125,3230 2353.58,3230 ; C8.2@2276.16,3183.84 ccw(c2254.82,3205.18) 2285,3205.18 ccw(c2315.18,3205.18) C8.2@2293.84,3183.84 ; C8.2@2285,3175 2285,3230 ; D1.2@2323.15,3261.06 cw(c2317.42,3225.36) 2353.58,3225.36 ; D1.2@2324.73,3270.94 cw(c2319.3,3237.09) 2353.58,3237.09 ; D1.2@2326.31,3280.81 cw(c2321.18,3248.82) 2353.58,3248.82 ; D1.2@2327.89,3290.68 cw(c2323.06,3260.55) D1.2@2353.58,3260.55 ; D1.2@2353.58,3295 2353.58,3230 ; U2.3@2393.67,3088.4 ccw(c2365.24,3116.83) 2405.45,3116.83 ccw(c2445.65,3116.83) U2.3@2417.22,3088.4 ; U2.3@2405.45,3055.95 2405.45,3224.55 ; v1(3155,3230) 2353.58,3230
XTAL_A: C2.2 U1.5 Y1.2 | length 558.4
  Top Layer w10: U1.5@2873.46,2650.47 2924.53,2650.47 2965,2610 3070,2610 3115,2565 C2.2@3155,2525 Y1.2@3247.01,2432.99 ; 3129.39,2550.61 ccw(c3155,2576.21) C2.2@3155,2540 ; 3135.43,2544.57 cw(c3118.36,2527.5) C2.2@3142.5,2527.5 ; C2.2@3155,2510 cw(c3155,2473.79) 3180.61,2499.39 ; C2.2@3167.5,2522.5 ccw(c3191.64,2522.5) 3174.57,2505.43
XTAL_B: C1.2 U1.6 Y1.1 | length 824.7
  Top Layer w10: U1.6@2873.46,2670.16 2934.84,2670.16 2975,2630 3088.71,2630 3115,2656.29 3115,2685 C1.2@3155,2725 Y1.1@3237.01,2807.01 ; 3129.39,2699.39 cw(c3155,2673.79) C1.2@3155,2710 ; 3135.43,2705.43 ccw(c3118.36,2722.5) C1.2@3142.5,2722.5 ; C1.2@3155,2740 ccw(c3155,2776.21) 3180.61,2750.61 ; C1.2@3167.5,2727.5 cw(c3191.64,2727.5) 3174.57,2744.57 ; 3200.71,2770.71 cw(c3268,2703.42) Y1.1@3268,2798.58 ; 3212.9,2782.9 ccw(c3162.84,2832.95) Y1.1@3233.63,2832.95 ; 3217.78,2787.78 cw(c3268,2737.56) Y1.1@3268,2808.58 ; Y1.1@3229.97,2799.97 ccw(c3196.98,2832.95) Y1.1@3243.63,2832.95 ; Y1.1@3234.85,2804.85 cw(c3268,2771.7) Y1.1@3268,2818.58
pads on no net: OLED1.7 Remote1.7 Remote1.8 Remote1.9 Remote1.10 Rmote2.7 Rmote2.8 Rmote2.9 Rmote2.10 SX1308.6 U1.2 U1.3 U1.4 U1.29 U2.4 U5.9 U5.10 U5.11 U5.12 U5.13 U5.14 U5.15 U5.16 U6.0 U6.4 U6.6 U6.7

## Keep-outs
Keep-Out Layer:
  lines w15: 1000,2771.65 cw(c1770.7,2564.26) 1787.4,3362.21 2574.8,3362.21 3362.21,3362.21 4149.61,3362.21 cw(c4165.79,2563.57) 4935.52,2777.11 cw(c3086.79,2430.89) 4364.02,1050.19 cw(c4337.29,1079.09) 4298.35,1073.27 ccw(c2752.55,842.3) 3610.39,2148.8 ccw(c3502.35,1984.25) 3502.35,2181.1 3440.95,2181.1 ccw(c3440.95,2141.73) 3401.58,2141.73 3401.58,1984.25 cw(c3362.21,1984.25) 3362.21,1944.88 2574.8,1944.88 cw(c2574.8,1984.25) 2535.43,1984.25 2535.43,2141.73 ccw(c2496.06,2141.73) 2496.06,2181.1 2434.82,2181.1 ccw(c2434.82,1984.25) 2326.53,2148.64 ccw(c3188.4,840.39) 1639.15,1073.12 cw(c1600.22,1078.97) 1573.51,1050.04 cw(c2849.26,2431.36) 1000,2771.65

## Silkscreen, mask and mechanical layers (free items; w line width, h text height)
Bottom Overlay:
  text "G" at 1415,3095 h30
  text "V" at 1515,3090 h30
  text "RX" at 1620,3085 h30
  text "TX" at 1735,3085 h30
  text "G" at 1195,2630 h30
  text "V" at 1190,2520 h30
  text "DIO" at 1230,2420 h30
  text "SDA" at 2820,2350 h30
  text "SCL" at 2930,2350 h30
  text "3.3v" at 3150,2350 h30
  text "G" at 3000,2345 h30
  text "CLK" at 1230,2320 h30

## Text inside footprints (layer, text, board x,y; h text height)
LS1: Top Overlay "+" at 3585,2640 h90
S_0: Bottom Overlay "2P" at 3435,3120 h30 r270